# Altium PCB PCB.PcbDoc
Units mm, origin at the board's own origin, x right, y up, seen from the top; angles counter-clockwise.
Board outline 40 x 40 mm, 2 copper layers (Top Layer, Bottom Layer); 13 components, 10 nets, 45 pads, 0 vias.
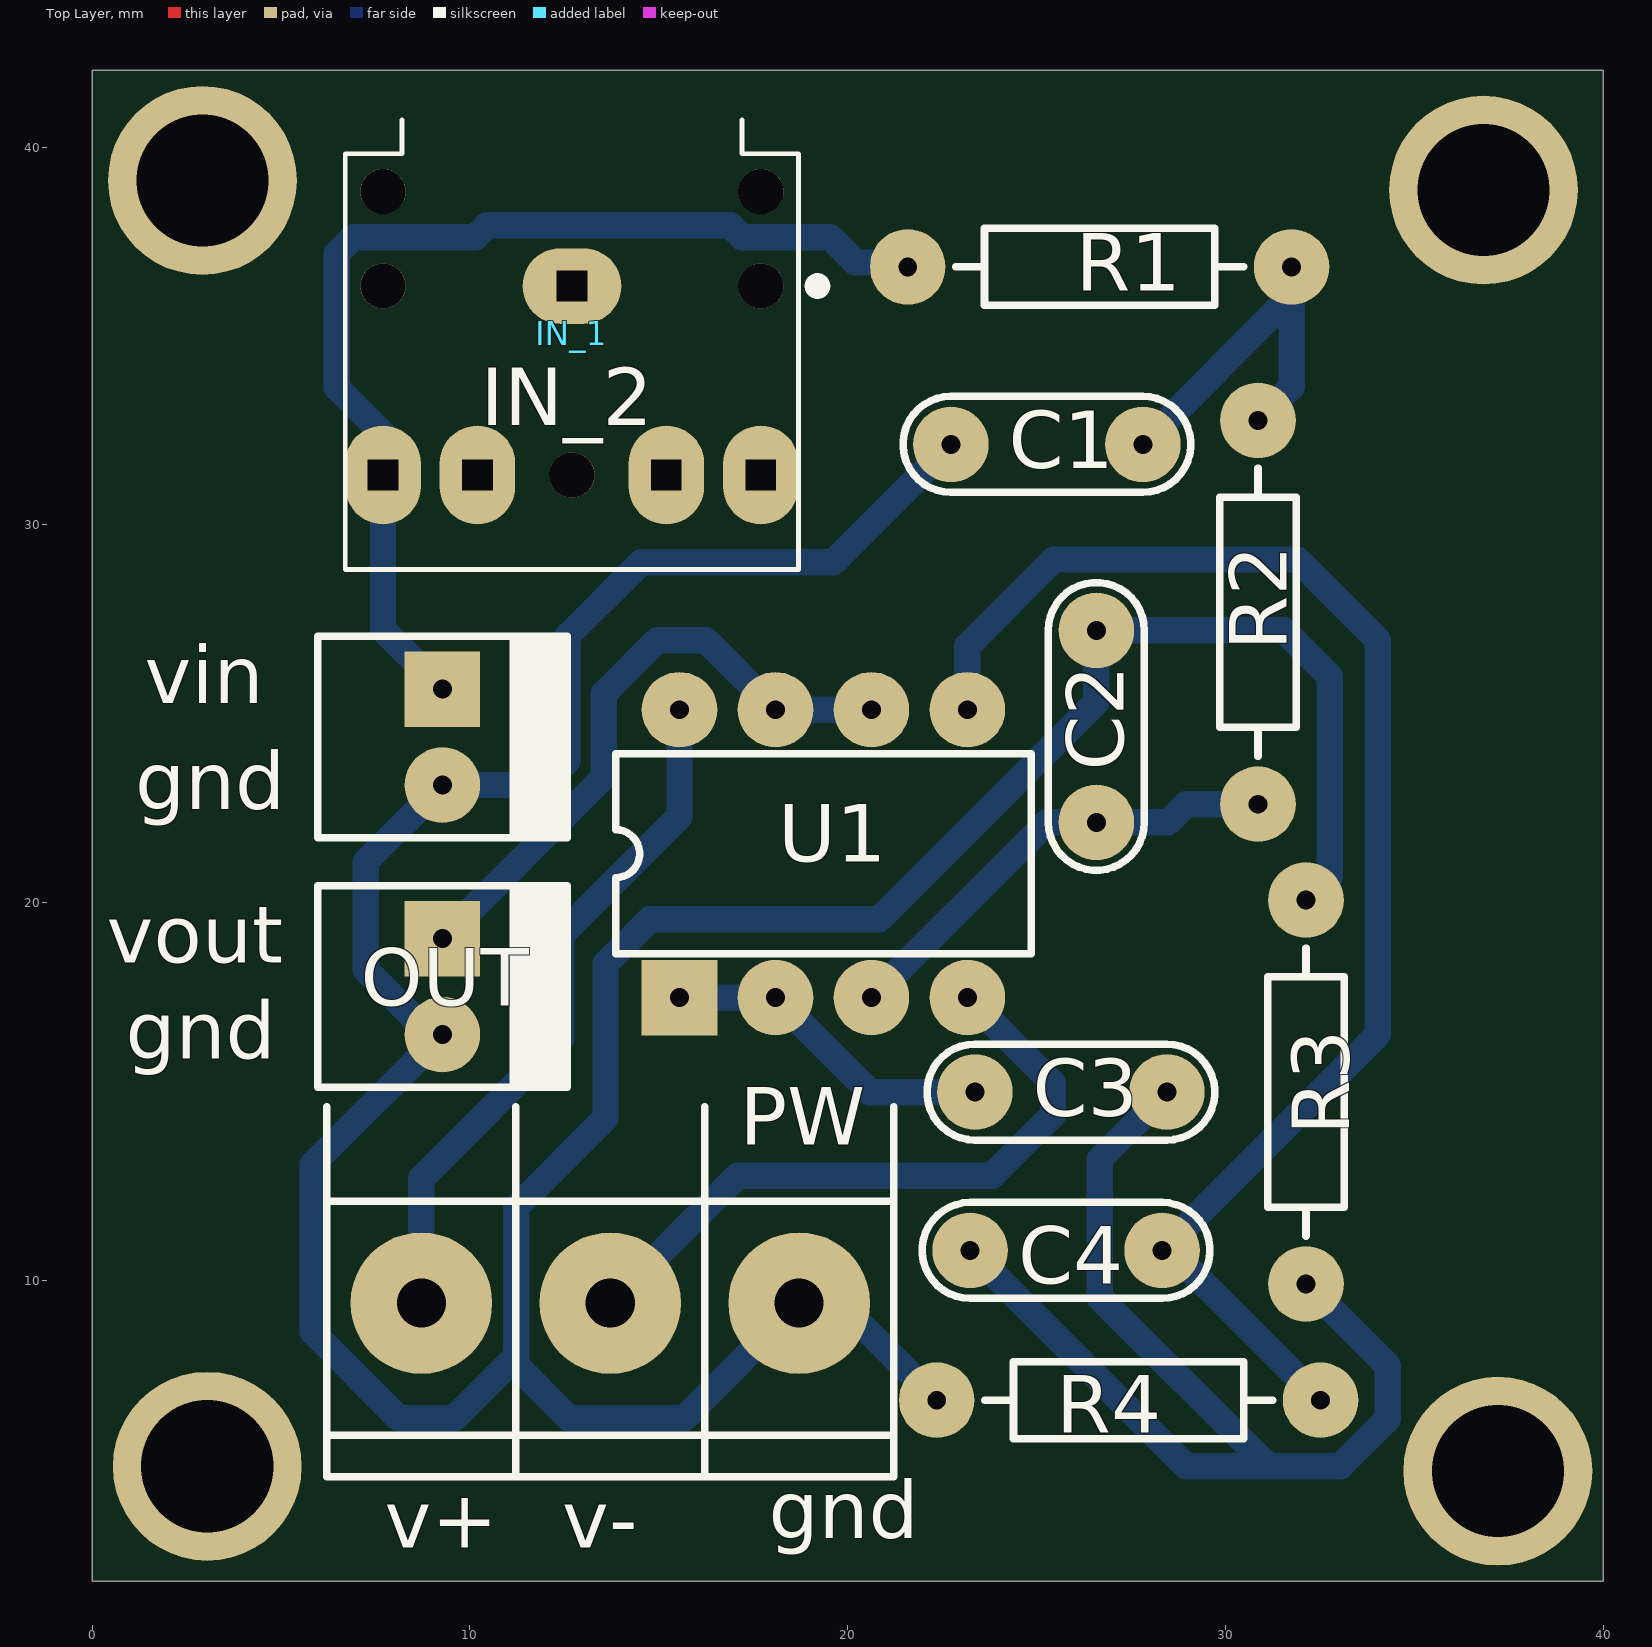
[diagram p0: Top Layer view]
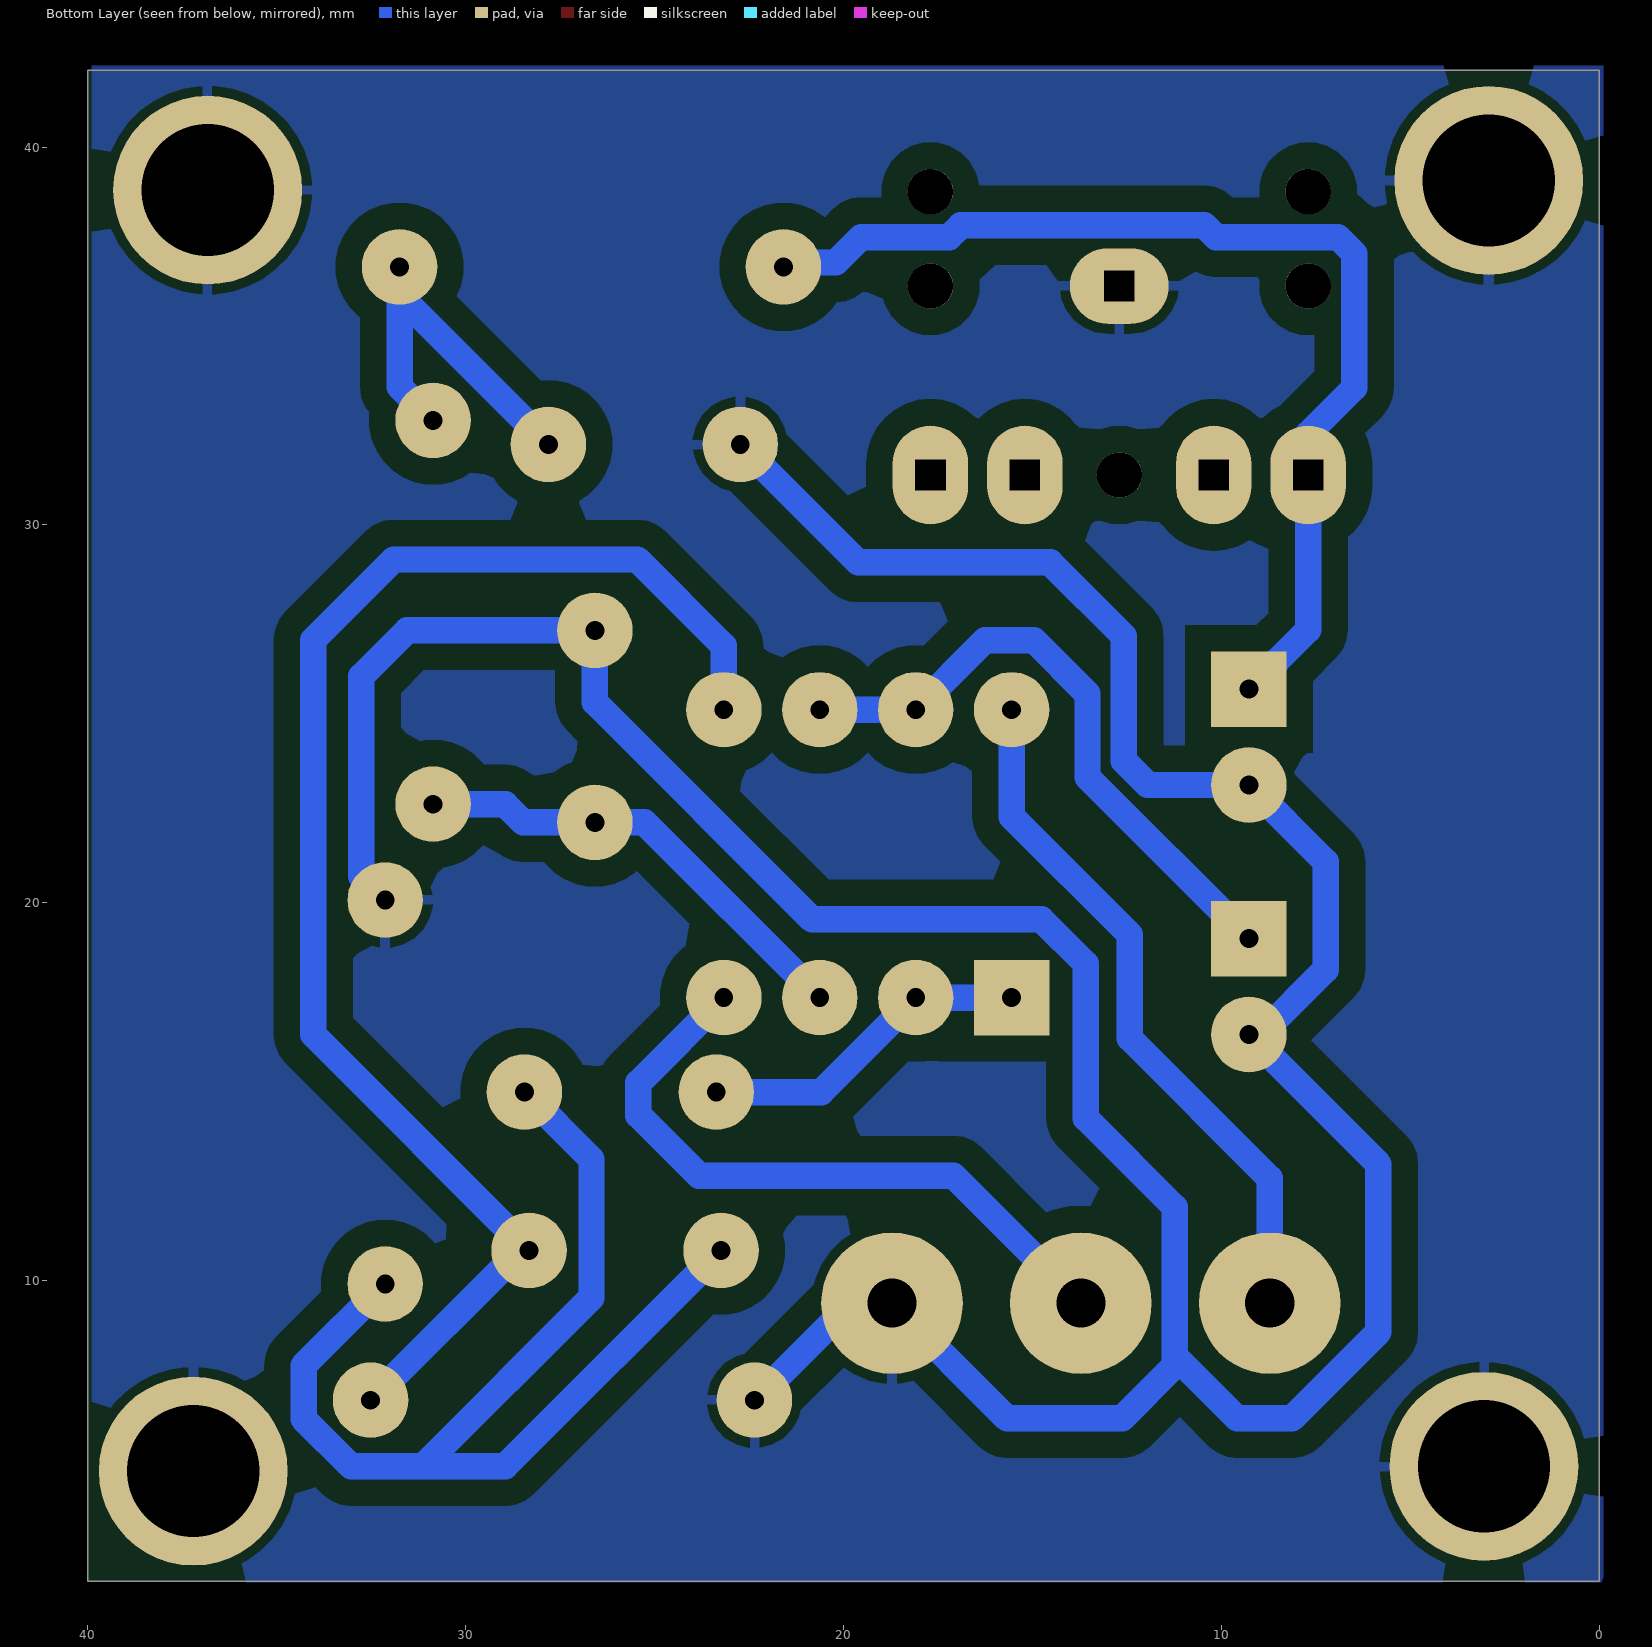
[diagram p1: Bottom Layer view, seen from below]
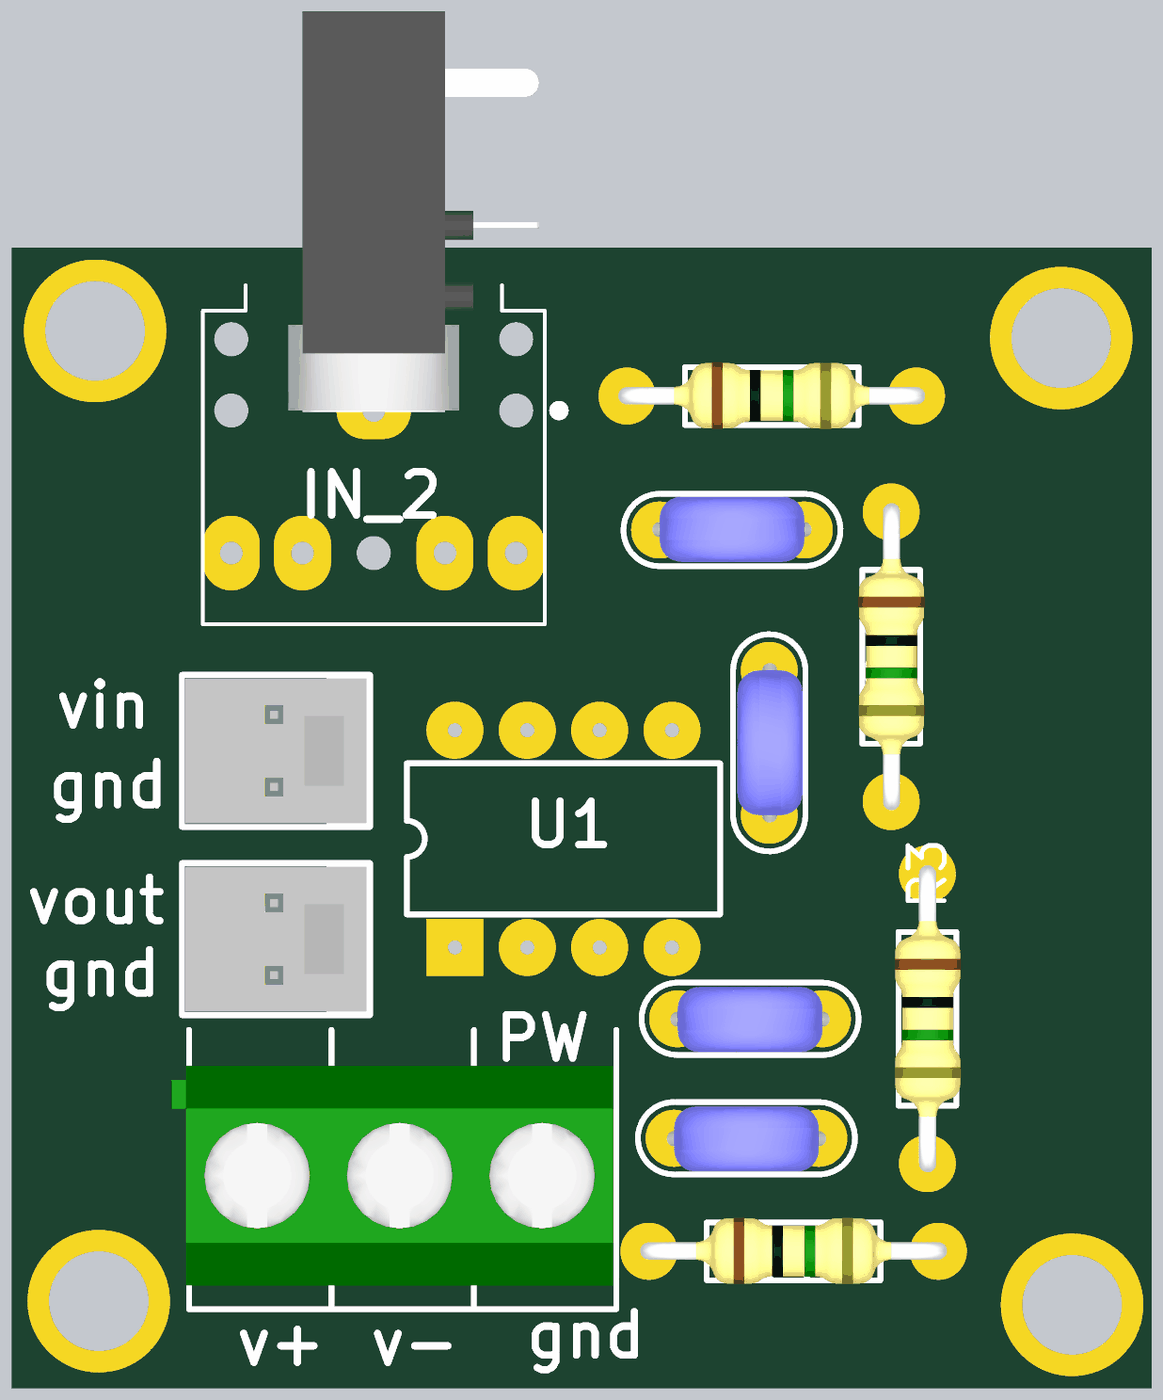
[diagram p2: 3D render of the assembled board from above, using the file's embedded part models]

## Layer stack, top to bottom
Top Solder: solder mask 0.0102, Solder Resist, Dk 3.5
Top Layer: signal copper 0.0356
Dielectric 1: dielectric 0.32, FR-4, Dk 4.8
Bottom Layer: signal copper 0.0356
Bottom Solder: solder mask 0.0102, Solder Resist, Dk 3.5

## Board outline
0,2.032 0,42.032 40,42.032 40,2.032

## Design rules (kind name [scope] priority, off if disabled: settings)
Clearance Clearance_1 [InPolygon] p1: gap=0.7 ignorepadtopadclearanceinfootprint=FALSE
Clearance [All] p2: gap=0.254 ignorepadtopadclearanceinfootprint=FALSE
HoleSize [All] p1: absolutevalues=TRUE maxlimit=5 minlimit=0.025 maxpercent=80.000 minpercent=20.000
MinimumSolderMaskSliver [All] p1 off: minsoldermaskwidth=0.254
PolygonConnect [All] p1: connectstyle=Relief reliefconductorwidth=0.254 reliefentries=4 polygonreliefangle="90 Angle" airgapwidth=0.254
RoutingLayers [All] p1: top layer_v5=FALSE bottom layer_v5=TRUE
RoutingVias [All] p1: holewidth=0.711 width=1.27 viastyle="Through Hole" minholewidth=0.711 minwidth=1.27 maxholewidth=0.711 maxwidth=1.27
SilkToSilkClearance [All] p1 off: silktosilkclearance=0.254
SilkToSolderMaskClearance [IsPad] p1 off: minsilkscreentomaskgap=0.254 clearancetoexposedcopper=TRUE
SolderMaskExpansion [All] p1: expansion=0 istentingtop=FALSE
SupplyNets "Schematic Supply Nets" [InNet('GND')] p1: voltage=0.000
Width [All] p1: maxlimit=1 minlimit=0.5 preferedwidth=0.7 minimp=50.000000 maximp=50.000000 favimp=50.000000
25 further rules are at their usual default settings.

## Classes and differential pairs
component class Sheet1: C1 C2 C3 C4 OUT PW R1 R2 R3 R4 U1

## Components (designator, comment, footprint, x,y, rotation, side; value= is the part's Value field where it differs from the comment)
C1 "10n" CAP200 25.273,32.131 r180 top
C2 "10n" CAP200 26.583,24.666 r90 top
C3 "100n" CAP200 25.908,14.986 r0 top
C4 "100n" CAP200 25.781,10.795 r0 top
IN_1 "SJ1-3525NG" CUI_SJ1-3525NG 12.7,36.322 r270 top
IN_2 "MOLEX2" MOLEX2 9.271,25.654 r270 top
OUT "MOLEX2" MOLEX2 9.271,19.05 r270 top
PW "BORNERA 3" BORNERA3 13.716,9.398 r90 top
R1 "1.8k" RES400 21.59,36.83 r0 top
R2 "1.8k" RES400 30.861,32.766 r270 top
R3 "15k" RES400 32.131,20.066 r270 top
R4 "15k" RES400 22.357,6.83 r0 top
U1 "TL082P" P008 19.359,21.297 r0 top

## Footprints (in the part's own frame and the unit in brackets; to place one, negate y for a bottom-side part, rotate by r counter-clockwise, add the part's x,y. Pads: shape width x height; smd on the part's side, far side on the other; paste and mask are expansions set on the pad)
BORNERA3 [mm] "Bornera con Tornillos 5mm separación"
  round 3.75 hole 1.3: 1(0,5) 2(0,0) 3(0,-5)
  silkscreen extent -4.6,-7.5 5.2,7.5, body extent -3.76,-7.39 3.94,8.11, height 10.05
CAP200 [mm]
  round 2 hole 0.5: 1(-2.54,0) 2(2.54,0)
  silkscreen extent -3.81,-1.27 3.81,1.27, body extent -2.79,-1.17 2.79,1.12, height 6.24
CUI_SJ1-3525NG [mm]
  oval 2x2.616 hole 0.8 square: 1(0,0)
  oval 2.616x2 hole 0.8 square: 2(5,-5) 3(5,5) 4(5,-2.5) 5(5,2.5)
  round 1.2 hole 1.2 unplated: ""(-2.5,5) ""(-2.5,-5) ""(0,5) ""(0,-5) ""(5,0)
  silkscreen extent -4.4,-6 7.5,6.67, body extent -14,-3 0.05,5.8, height 6
MOLEX2 [mm]
  rect 2x2 hole 0.5: 1(0,0)
  round 2 hole 0.5: 2(2.54,0)
  silkscreen extent -1.4,-3.3 3.94,3.3, body extent -1.27,-3.18 3.81,3.18, height 10.74
P008 [mm] "DIP; 8 Leads; Row Spacing 7.62 mm; Pitch 2.54 mm"
  rect 2x2 hole 0.5: 1(-3.81,-3.81)
  round 2 hole 0.5: 2(-1.27,-3.81) 3(1.27,-3.81) 4(3.81,-3.81) 5(3.81,3.81) 6(1.27,3.81) 7(-1.27,3.81) 8(-3.81,3.81)
  silkscreen extent -5.5,-2.65 5.5,2.65
RES400 [mm]
  round 2 hole 0.5: 1(0,0) 2(10.16,0)
  silkscreen extent 1.27,-1.02 8.89,1.02, body extent -0.3,-1.14 10.46,1.17, height 2.43

## Part data
C1 C2 C3 C4: library part CAP
IN_1: "3.5 mm, Stereo, Right Angle, Through Hole, Isolated Ground, 3 Conductors, 2 Internal Switches, Audio Jack Connector", Package=None, Check_prices=https://www.snapeda.com/parts/SJ1-3525NG/Same+Sky/view-part/?ref=eda, MF="Same Sky", MP=SJ1-3525NG, SnapEDA_Link=https://www.snapeda.com/parts/SJ1-3525NG/Same+Sky/view-part/?ref=snap
R1 R2 R3 R4: library part RES
U1: "JFET-Input Operational Amplifier", Code_JEDEC=MO-001-AN, ComponentLink1Description="Manufacturer Link", ComponentLink1URL=http://www.ti.com/, ComponentLink2Description=Datasheet, ComponentLink2URL=http://www-s.ti.com/sc/ds/tl082.pdf, DatasheetVersion=Feb-1999, LatestRevisionDate=04-Mar-2005, LatestRevisionNote="Stylized 3D Model Added.", PackageDescription="DIP; 8 Leads; Row Spacing 7.62 mm; Pitch 2.54 mm", PackageReference=P008, PackageVersion=Jun-1999, Published=16-Jan-2001, Publisher="Altium Limited"

## Free pads (board coordinates)
  round 5 hole 3.5 unplated: MH1(2.921,39.116) MH1(3.048,5.08) MH1(36.83,38.862) MH1(37.211,4.953)

## Nets (pads, with @x,y where several pads share a name; then routed paths per layer and width w, separated by ;. In a path a pad name is that pad's centre, name@x,y a point inside that pad or via, vN(x,y) a via of type N, cw(c..) or ccw(c..) an arc to the next point about the centre after c; other vN are vias at no path point)
+v: PW.1 U1.8 | length 18.5
  Bottom Layer w0.7: PW.1 8.716,12.701 12.424,16.409 12.424,19.154 15.549,22.279 U1.8
-v: PW.2 U1.4 | length 17.8
  Bottom Layer w0.7: PW.2 17.094,12.776 23.825,12.776 25.428,14.379 25.428,15.228 U1.4
GND: C1.2 C2.2 IN_1.1 IN_2.2 OUT.2 pad.MH1 PW.3 R3.1 R4.1 | length 100.2
  Bottom Layer w0.7: R4.1 19.789,9.398 PW.3 15.668,6.35 12.627,6.35 11.23,7.747 11.23,8.001 ; C1.2 19.609,29.007 14.532,29.007 12.577,27.051 12.577,23.749 11.942,23.114 IN_2.2 7.239,21.082 7.239,18.228 8.957,16.51 OUT.2 5.842,13.081 5.842,8.636 8.128,6.35 9.579,6.35 11.23,8.001 ; R3.1 32.766,20.701 32.766,25.988 31.548,27.206 C2.2 26.583,25.309 20.832,19.558 14.765,19.558 13.589,18.382 13.589,14.297 11.23,11.938 11.23,8.001
NetC1_1: C1.1 R1.2 R2.1 | length 10
  Bottom Layer w0.7: C1.1 R1.2@31.75,36.068 ; R2.1 31.75,33.655 R1.2@31.75,36.068 ; R1.2 R1.2@31.75,36.068
NetC2_1: C2.1 R2.2 U1.3 | length 12.4
  Bottom Layer w0.7: U1.3 25.268,22.126 C2.1 28.477,22.126 28.957,22.606 R2.2
NetC3_1: C3.1 U1.1 U1.2 | length 8.9
  Bottom Layer w0.7: U1.1 U1.2 20.59,14.986 C3.1
NetC3_2: C3.2 C4.1 R3.2 | length 30.9
  Bottom Layer w0.7: C4.1 28.956,5.08 31.136,5.08 ; C3.2 26.67,13.208 26.67,9.546 31.136,5.08 ; R3.2 34.29,7.747 34.29,6.334 33.036,5.08 31.136,5.08
NetC4_2: C4.2 R4.2 U1.5 | length 38.8
  Bottom Layer w0.7: U1.5 23.169,26.797 25.455,29.083 31.906,29.083 34.036,26.953 34.036,16.51 C4.2 28.552,10.795 R4.2
Vin: IN_1.2 IN_2.1 R1.1 | length 28.6
  Bottom Layer w0.7: IN_2.1 7.7,27.225 IN_1.2 7.7,32.41 6.481,33.63 6.481,37.182 6.917,37.618 10.141,37.618 10.449,37.926 16.893,37.926 17.201,37.618 19.532,37.618 20.205,36.945 21.475,36.945 R1.1
Vout: OUT.1 U1.6 U1.7 | length 16.7
  Bottom Layer w0.7: OUT.1 13.542,23.321 13.542,25.527 14.964,26.949 16.246,26.949 U1.7 U1.6
pads on no net: IN_1. IN_1.3 IN_1.4 IN_1.5

## Polygon pours and split planes (outlines as drawn)
GND on Bottom Layer "NONET_L02_P-001" (solid, pour order 1): -0.11,42.148 39.895,42.148 39.895,2.016 -0.237,2.016 -0.11,2.143 -0.11,23.606

## Silkscreen, mask and mechanical layers (free items; w line width, h text height)
Top Overlay:
  text "vin" at 1.397,25.273 h1.52
  text "gnd" at 1.143,22.479 h1.52
  text "vout" at 0.381,18.415 h1.52
  text "gnd" at 0.889,15.875 h1.52
  text "gnd" at 17.907,3.175 h1.52
  text "v+" at 7.747,2.921 h1.52
  text "v-" at 12.446,2.921 h1.52
Mechanical 1:
  the board outline again, w0.254

## Text inside footprints (layer, text, board x,y; h text height)
IN_1: Mechanical 13 "PCB edge" at 18.712,48.847 h1.02 r270